# Altium PCB 第一次打板.PcbDoc
Units mil, origin at the board's own origin, x right, y up, seen from the top; angles counter-clockwise.
Board outline 5160 x 2575.29 mil, 2 copper layers (Top Layer, Bottom Layer); 62 components, 86 nets, 344 pads, 7 vias.
Unrouted connection lines stored in the file: 1.
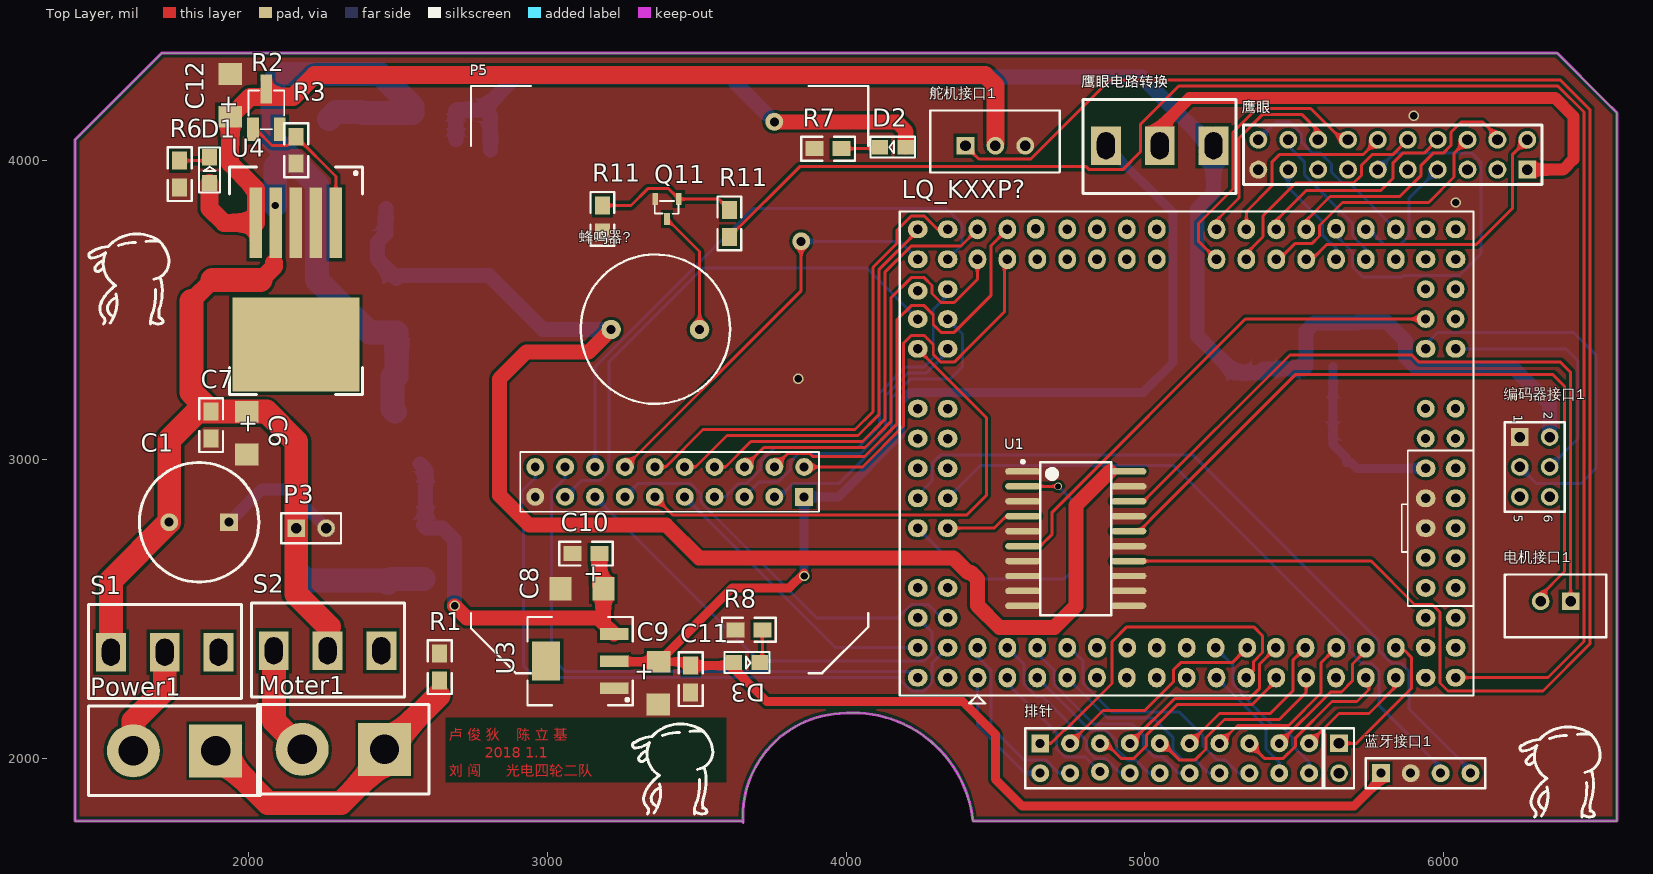
[diagram p0: Top Layer view]
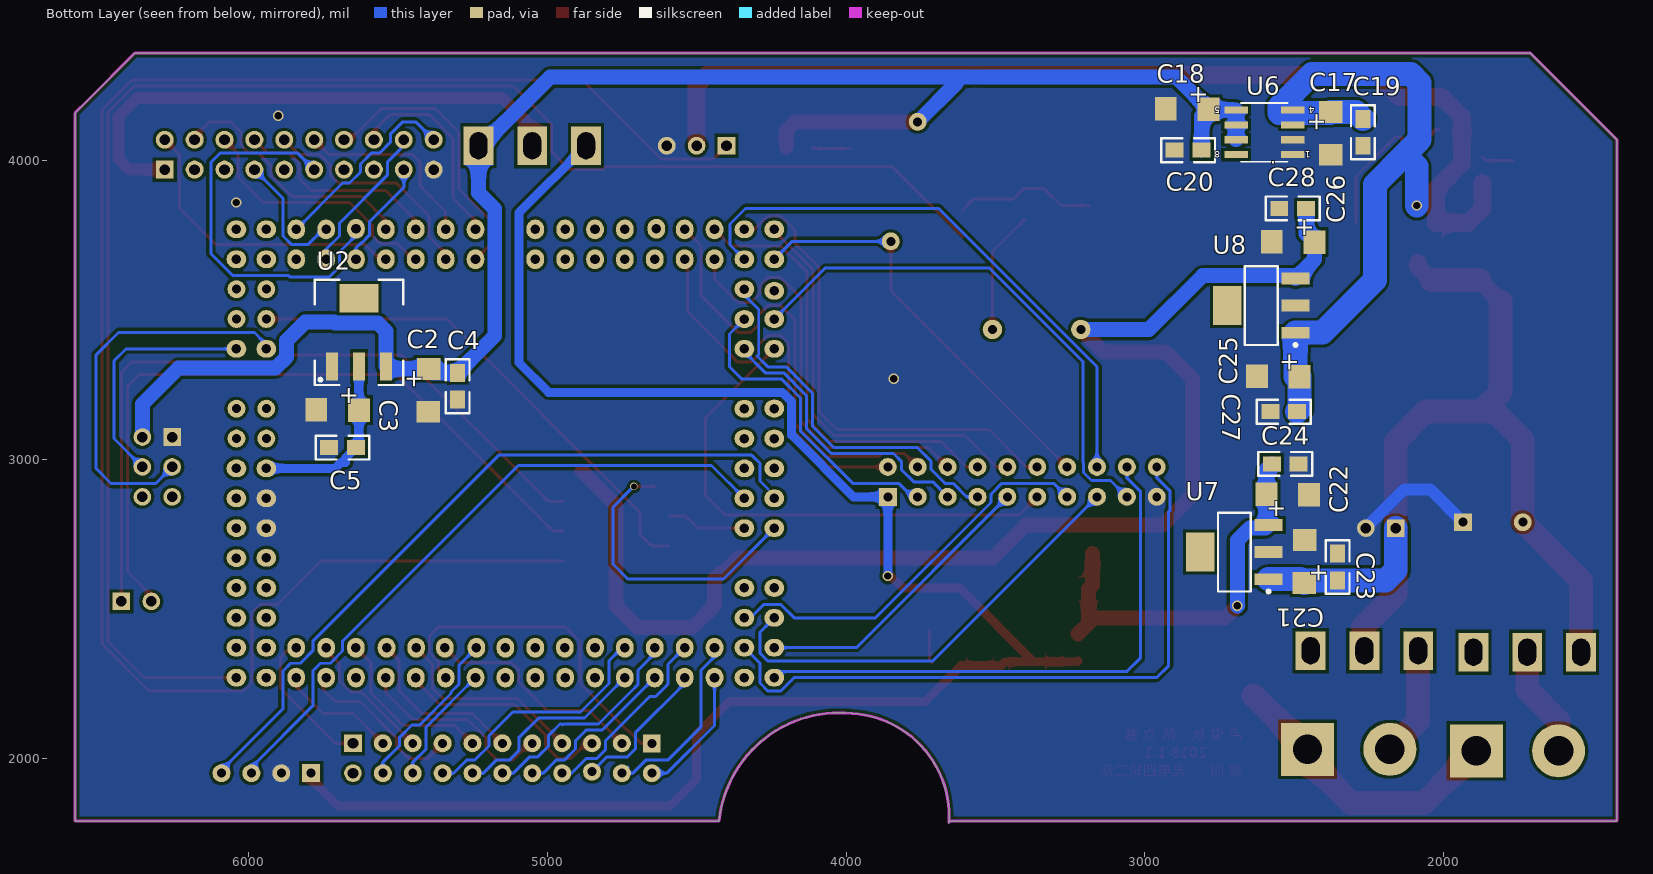
[diagram p1: Bottom Layer view, seen from below]

## Layer stack, top to bottom
Top Solder: solder mask 0.4, Solder Resist, Dk 3.5
Top Layer: signal copper 1.4
Dielectric 1: dielectric 12.6, FR-4, Dk 4.8
Bottom Layer: signal copper 1.4
Bottom Solder: solder mask 0.4, Solder Resist, Dk 3.5

## Board outline
1420,1790 1420,4070 1710,4360 6380,4360 6540,4200 6580,4160 6580,1790 4424.71,1790 ccw(c4022.35,1747.65) 3980,2150 ccw(c4000.29,1805) 3655.29,1784.71 3650,1790

## Design rules (kind name [scope] priority, off if disabled: settings)
Clearance [All] p1: gap=10
ComponentClearance [All] p1: gap=0 collisioncheckmode=3 verticalgap=0 showdistances=FALSE
PlaneConnect [All] p1: planeconnectstyle=Direct reliefexpansion=20 reliefentries=4 reliefconductorwidth=10 reliefairgap=10
PolygonConnect [All] p1: connectstyle=Direct reliefconductorwidth=10 reliefentries=4 polygonreliefangle="90 Angle" airgapwidth=10
RoutingVias [All] p1: holewidth=28 width=50 viastyle="Through Hole" minholewidth=28 minwidth=50 maxholewidth=28 maxwidth=50
SolderMaskExpansion [All] p1: expansion=4
Width [All] p1: maxlimit=100 minlimit=10 preferedwidth=10
28 further rules are at their usual default settings.

## Classes and differential pairs
component class Sheet1: LQ_KXXP?

## Components (designator, comment, footprint, x,y, rotation, side; value= is the part's Value field where it differs from the comment)
* "Component_1" HDR2X1 5650,2050 r270 top
C1 "C-470uf电解电容" C-470uF电解电容 1835,2790 r180 top
C2 "C-10uf钽电容" 10uf钽电容 5400,3235 r270 bottom
C3 "C-10uf钽电容" 10uf钽电容 5698,3168 r0 bottom
C4 "C-0.1uf" 0805 5300,3200 r90 bottom
C5 "C-0.1uf" 0805 5730,3040 r180 bottom
C6 "C-22uf钽电容" C-22uf钽电容 1992,3092 r270 top
C7 "C-0.1uf" 0805 1875,3070 r90 top
C8 "C-10uf钽电容" 10uf钽电容 3120,2570 r180 top
C9 "C-10uf钽电容" 10uf钽电容 3370,2255 r270 top
C10 "C-0.1uf" 0805 3085,2685 r0 top
C11 "C-0.1uf" 0805 3480,2220 r90 top
C12 "C-22uf钽电容" C-22uf钽电容 1942,4215 r90 top
C17 "C-10uf钽电容" 10uf钽电容 2380,4095 r270 bottom
C18 "C-10uf钽电容" 10uf钽电容 2855,4175 r0 bottom
C19 "C-0.1uf" 0805 2270,4050 r90 bottom
C20 "C-0.1uf" 0805 2810,4035 r0 bottom
C21 "C-10uf钽电容" 10uf钽电容 2463,2655 r90 bottom
C22 "C-10uf钽电容" 10uf钽电容 2525,2880 r180 bottom
C23 "C-0.1uf" 0805 2355,2685 r270 bottom
C24 "C-0.1uf" 0805 2485,2985 r0 bottom
C25 "C-10uf钽电容" 10uf钽电容 2550,3280 r0 bottom
C26 "C-10uf钽电容" 10uf钽电容 2500,3730 r0 bottom
C27 "C-0.1uf" 0805 2580,3160 r180 bottom
C28 "C-0.1uf" 0805 2460,3840 r0 bottom
D1 "" LED-0805 1870,3970 r90 top
D2 "" LED-0805 4155,4045 r180 top
D3 "" LED-0805 3670,2320 r0 top
LQ_KXXP? "LQ_KXXP144-SYSVG" LQ_KXXP144-SYSVG 4440,2270 r0 top
Moter1 "驱动接口" 14AWG接口x2 2455,2030 r180 top
P3 "数码管接口" HDR2X1 2160,2770 r0 top
P5 "山外LCD" 山外LCD插座 2745,2285 r0 top
Power1 "电源接口" 14AWG接口x2 1890,2025 r180 top
Q11 "QNPN" J3Y晶体管 3405,3840 r180 top (schematic designator Q?)
R1 "0欧电阻" 0805 2640,2350 r270 top
R2 "10K可调电阻" 10K贴片可调电阻 2060,4180 r0 top
R3 "1k" 0805 2160,3990 r90 top
R6 "5.1k" 0805 1770,3910 r90 top
R7 "4.7k" 0805 3895,4040 r0 top
R8 "3.3k" 0805 3630,2430 r0 top
R11 "100R" 0805 3610,3745 r90 top (schematic designator R?)
R11 "1k" 0805 3185,3760 r90 top (schematic designator R?)
S1 "三脚开关" 大开关 1720,2355 r180 top
S2 "三脚开关" 大开关 2265,2360 r180 top
U1 "74HC244" 74HC244 4770,2730 r0 top
U2 "LM1117-3.3V" LM1117 5630,3425 r90 bottom
U3 "LM1117-3.3V" LM1117 3110,2325 r180 top
U4 "LM2941" LM2941 2160,3590 r270 top
U6 "TPS7350" TPS7350 2600,4095 r0 bottom
U7 "LM2940-TO-223-5V" lm2940-sot223 2700,2690 r0 bottom
U8 "LM2940-TO-223-5V" lm2940-sot223 2610,3515 r0 bottom
排针 "Component_1" HDR10X2 4650,2050 r0 top
电机接口1 "电机接口1" 白插座2X1 6425,2525 r180 top
编码器接口1 "编码器接口" 编码器接口 6305,2975 r270 top
舵机接口1 "舵机接口" 白插座3X1 4400,4050 r0 top
蓝牙接口1 "蓝牙串口接口" 蓝牙串口接口 5790,1950 r0 top
蜂鸣器? "Buzzer" 蜂鸣器 3362,3435.98 r0 top
鹰眼 "鹰眼" H10X2 6280,4070 r270 top (schematic designator H*?)
鹰眼电路转换 "三脚开关" 大开关 5050,4050 r0 top (schematic designator S?)
? "Comment" 兔斯基 1610,3600 r0 top
? "Comment" 兔斯基 6400,1950 r0 top
? "Comment" 兔斯基 3430,1960 r0 top

## Footprints (in the part's own frame and the unit in brackets; to place one, negate y for a bottom-side part, rotate by r counter-clockwise, add the part's x,y. Pads: shape width x height; smd on the part's side, far side on the other; paste and mask are expansions set on the pad)
10K贴片可调电阻 [mm]
  rect 1x2 smd paste-0.025 mask+0: 1(-1.143,-1.905) 3(1.143,-1.905)
  rect 1x2.5 smd paste-0.025 mask+0: 2(0,1.524)
  silkscreen extent -1.52,-1.91 1.52,1.4
10uf钽电容 [mil]
  rect 72.99x78.74 smd: 1(-68,3) 2(75,2)
14AWG接口x2 [mm] "电源洞洞"
  rect 4.5x4.5 hole 2.5: 1(-0.015,0)
  round 4.5 hole 2.5: 2(6.985,0)
  silkscreen extent -3.81,-3.81 10.79,3.81
74HC244 [mm]
  oval 3x0.55 smd: 1(-4.525,5.842) 2(-4.525,4.572) 3(-4.525,3.302) 4(-4.525,2.032) 5(-4.525,0.762) 6(-4.525,-0.508) 7(-4.525,-1.778) 8(-4.525,-3.048) 9(-4.525,-4.318) 10(-4.525,-5.588) 11(4.475,-5.588) 12(4.475,-4.318) 13(4.475,-3.048) 14(4.475,-1.778) 15(4.475,-0.508) 16(4.475,0.762) 17(4.475,2.032) 18(4.475,3.302) 19(4.475,4.572) 20(4.475,5.842)
  silkscreen extent -4.65,-6.37 3,6.79, body extent -3.82,-6.38 3.77,6.63, height 2.64
0805 [mil]
  rect 60x50 smd: 1(0,0) 2(90,0)
  silkscreen extent -45,-40 135,40
C-22uf钽电容 [mil]
  rect 72.99x78.74 smd: 1(-68,3) 2(75,2)
C-470uF电解电容 [mil] "可用于470uF,1000uF,2200uF"
  rect 60x60 hole 30: 1(-100,0)
  round 60 hole 30: 2(100,0)
  silkscreen extent -200,-200 200,200
H10X2 [mil] "鹰眼直插管脚"
  rect 60x60 hole 36: 1(100,0)
  round 60 hole 36: 2(0,0) 3(100,-100) 4(0,-100) 5(100,-200) 6(0,-200) 7(100,-300) 8(0,-300) 9(100,-400) 10(0,-400) 11(100,-500) 12(0,-500) 13(100,-600) 14(0,-600) 15(100,-700) 16(0,-700) 17(100,-800) 18(0,-800) 19(100,-900) 20(0,-900)
  silkscreen extent -50,-950 150,50
HDR2X1 [mm] "Connector; Header; 2 Position"
  rect 1.5x1.5 hole 0.9: 1(0,0)
  round 1.5 hole 0.9: 2(2.54,0)
  silkscreen extent -1.27,-1.27 3.81,1.27
HDR10X2 [mil]
  rect 60x60 hole 30: 1(0,0)
  round 60 hole 30: 2(100,0) 3(200,0) 4(300,0) 5(400,0) 6(500,0) 7(600,0) 8(700,0) 9(800,0) 10(900,0) 11(900,-100) 12(800,-100) 13(700,-100) 14(600,-100) 15(500,-100) 16(400,-100) 17(300,-100) 18(200,-95) 19(100,-100) 20(0,-100)
  silkscreen extent -50,-150 945,50
J3Y晶体管 [mm]
  rect 0.5x1 smd: 1(-0.9,-0.8) 2(1.1,-0.8) 3(0.1,0.9)
  silkscreen extent -0.87,-0.63 1.15,0.45
LED-0805 [mm]
  rect 1.4x1.27 smd: 1(-1.143,0) 2(1.067,0)
  silkscreen extent -1.94,-0.89 1.87,0.89
LM1117 [mm]
  rect 2.4x1 smd: 1(-2.9,2.3) 2(-2.9,0) 3(-2.9,-2.3)
  rect 2.4x3.3 smd: 4(2.9,0)
  silkscreen extent -4.47,-3.76 4.47,3.76, body extent -1.85,-3.35 1.85,3.35, height 1.8
lm2940-sot223 [mm]
  rect 2.4x1 smd: 1(-2.9,2.3) 2(-2.9,0) 3(-2.9,-2.3)
  rect 2.4x3.3 smd: 4(2.9,0)
  silkscreen extent -3.02,-3.35 1.4,3.47, body extent -1.85,-3.35 1.85,3.35, height 1.8
LM2941 [mm]
  rect 6x1.07 smd: 1(-5.133,3.376) 2(-5.133,1.676) 3(-5.133,-0.024) 4(-5.133,-1.724) 5(-5.133,-3.424)
  rect 8x10.8 smd: 6(5.225,-0.024)
  silkscreen extent -9.86,-5.66 9.44,5.61, body extent -4.65,-5.23 4.24,5.18, height 4.65
LQ_KXXP144-SYSVG [mil]
  oval 59x66 hole 32: 1(0,0) 2(0,100) 3(100,0) 4(100,100) 5(200,0) 6(200,100) 7(300,0) 8(300,100) 9(400,0) 10(400,100) 11(500,0) 12(500.79,100) 13(600,0) 14(600,100) 15(700,0) 16(700,100) 17(800,0) 18(796.85,100) 19(900,0) 20(902.36,100) 21(1000,0) 22(998.82,100) 23(1100,0) 24(1097.64,100) 25(1200,0) 26(1200.39,100) 27(1300,0) 28(1300,100) 29(1400,0) 30(1400.39,100) 63(1400,1500) 64(1400,1400) 65(1300,1500) 66(1300,1400) 67(1200,1501.97) 68(1200,1400) 69(1100,1500) 70(1100,1400) 71(1000,1500) 72(1000,1400) 73(900,1500) 74(900,1400) 75(800,1500) 76(800,1400) 79(600,1500) 80(600,1400) 81(500,1500) 82(500,1400) 83(400,1500) 84(400,1400) 85(300,1500) 86(300,1400) 87(194.88,1502.36) 88(200,1400) 89(100,1500) 90(100,1400) 91(0,1500) 92(0,1400)
  oval 66x59 hole 32: 31(1500,0) 32(1600,0) 33(1500,100) 34(1600,100) 35(1500,200) 36(1600,200) 37(1500,300) 38(1600,300) 39(1500,400.79) 40(1600,400) 41(1500,500) 42(1600,500.39) 43(1500,600) 44(1600,600) 45(1500,700) 46(1600,700) 53(1500,1100) 54(1600,1100) 59(1500,1400) 60(1600,1400) 61(1500,1500) 62(1600,1500) 93(-100,1500) 94(-200,1500) 95(-100,1400) 96(-200,1400) 97(-100,1300) 98(-200,1294.09) 99(-100,1200) 100(-200,1200) 101(-100,1100) 102(-200,1100) 105(-100,899.61) 106(-200,900.39) 107(-100,800) 108(-200,800) 109(-100,700) 110(-200,700) 111(-100,600) 112(-200,600) 113(-100,500) 114(-200,500) 117(-100,300) 118(-200,300) 119(-100,200) 120(-200,200) 121(-100,100) 122(-200,100) 123(-100,0) 124(-200,0)
  round 60 hole 30: 47(1500,800) 48(1600,800) 49(1500,900) 50(1600,900) 55(1500,1200) 56(1600,1200) 57(1500,1300) 58(1600,1300)
  round 0 all layers, no hole: 51(1500,1000) 52(1600,1000) 77(700,1500) 78(700,1400) 103(-100,1000) 104(-200,1000) 115(-100,400) 116(-200,400)
  silkscreen extent -260,-87 1660,1560
TPS7350 [mm]
  rect 2x0.6 smd paste-0.025 mask+0: 1(-2.4,1.905) 2(-2.4,0.635) 3(-2.4,-0.635) 4(-2.4,-1.905) 5(2.4,-1.905) 6(2.4,-0.635) 7(2.4,0.635) 8(2.4,1.905)
  silkscreen extent -2,-2.5 2,2.5
兔斯基 [mil]
  silkscreen extent -144,-147 124,155
大开关 [mil]
  rect 100x130 hole 60 slot 90 at 90 deg: 1(-180,0) 2(0,0) 3(180,0)
  silkscreen extent -257,-159 255,155
山外LCD插座 [mil]
  rect 60x60 hole 30: 1(1115,590)
  round 60 hole 30: 2(1015,590) 3(915,590) 4(815,590) 5(715,590) 6(615,590) 7(515,590) 8(415,590) 9(315,590) 10(215,590) 11(215,690) 12(315,690) 13(415,690) 14(515,690) 15(615,690) 16(715,690) 17(815,690) 18(915,690) 19(1015,690) 20(1115,690)
  silkscreen extent 0,0 1330,1965
白插座2X1 [mm] "Connector; Header; 3 Position"
  rect 1.5x1.5 hole 0.9: 1(0,0)
  round 1.5 hole 0.9: 2(2.54,0)
  silkscreen extent -3.05,-2.29 5.59,3.05
白插座3X1 [mm] "Connector; Header; 3 Position"
  rect 1.5x1.5 hole 0.9: 1(0,0)
  round 1.5 hole 0.9: 2(2.54,0) 3(5.08,0)
  silkscreen extent -3,-2.27 8,3
编码器接口 [mm]
  rect 1.5x1.5 hole 0.9: 1(-2.54,-1.27)
  round 1.5 hole 0.9: 2(-2.54,1.27) 3(0,-1.27) 4(0,1.27) 5(2.54,-1.27) 6(2.54,1.27)
  silkscreen extent -3.81,-2.54 3.81,2.54
蓝牙串口接口 [mil]
  rect 60x60 hole 30: 1(0,0)
  round 60 hole 30: 2(100,0) 3(200,0) 4(300,0)
  silkscreen extent -50,-50 350,50
蜂鸣器 [mil]
  round 65 hole 30: 1(-148,-0.98) 2(148,-0.98)
  silkscreen extent -250,-250 250,250

## Part data
C1: "Polarized Capacitor (Surface Mount)"
C2 C3 C6 C8 C9 C12 C17 C18 C21 C22 C25 C26: "Polarized Capacitor (Axial)"
C4 C5 C7 C10 C11 C19 C20 C23 C24 C27 C28: "Capacitor"
D1 D2 D3: library part 发光二极管, "发光二极管"
Moter1: library part 电源接口
P3 电机接口1: library part Header2X1, "Header, 2-Pin, Right Angle"
P5: "Header, 4-Pin, Dual row"
Q11: library part dynatron, "NPN型三极管"
R1 R3 R6 R7 R8 R11 R11: library part R-0805
R2: library part 可调电阻
U1: "内置三态门 用于隔离"
U2 U3: library part LM1117
U7: library part LM2940-TO-223
U8: library part LM2940
舵机接口1: library part Header3X1, "Header, 3-Pin"
蓝牙接口1: "Header, 4-Pin"
蜂鸣器?: "Magnetic Transducer Buzzer"
鹰眼: "鹰眼直插管脚"

## Free pads (board coordinates)
  round 60 hole 30: 2(3850,3730) 4(3760,4130)

## Via types
v1: diameter 35, hole 25, Top Layer to Bottom Layer, 6 vias
v2: diameter 25, hole 20, Top Layer to Bottom Layer, 1 vias

## Nets (pads, with @x,y where several pads share a name; then routed paths per layer and width w, separated by ;. In a path a pad name is that pad's centre, name@x,y a point inside that pad or via, vN(x,y) a via of type N, cw(c..) or ccw(c..) an arc to the next point about the centre after c; other vN are vias at no path point)
1PWM+: U1.18 电机接口1.1 | length 2472.8
  Top Layer w10: U1.18 4996.05,2860 5486.05,3350 5893.57,3350 5918.07,3325.5 6391.54,3325.5 6425,3292.04 电机接口1.1
1PWM-: U1.16 电机接口1.2 | length 2445.5
  Top Layer w10: U1.16 4980.92,2760 5020.22,2799.3 5020.22,2800.22 5503.76,3283.76 6366.24,3283.76 6405,3245 6405,2625 6325,2545 电机接口1.2
3.3V_1: C9.1 C11.2 D3.1 P5.1 U3.2 蓝牙接口1.1 鹰眼电路转换.1 | length 6091.1
  Top Layer w30: U3.2 3226.17,2323 C9.1 ; v1@3860,2620 3810,2570 3620,2570 C9.1 ; 蓝牙接口1.1 5790,1930 5700,1840 4590,1840 4500,1930 4500,2080 4390,2190 3735.01,2190 3615.01,2310 C11.2 3467,2323 C9.1
  Bottom Layer w30: v1(3860,2610) P5.1 3975,2875 4182,3082 4182,3192.97 4213.93,3224.89 4994.89,3224.89 5094.5,3324.5 5094.5,3825.5 鹰眼电路转换.1
3.3V_2: 
5V_1: C2.1 C4.2 C18.1 C20.1 D2.1 pad.4 U2.3 U6.5 U6.6 U6.7 编码器接口1.2 鹰眼电路转换.3 | length 5919.2
  Top Layer w50: pad.4 4170,4130 4199.99,4100.01 D2.1
  Bottom Layer w10: 3560,4280 3570,4280 ; 3630,4260 3630,4280
  Bottom Layer w50: U6.7 U6.6 U6.5 2785,4170 C18.1 ; C20.1 2810,4149 C18.1 ; 3560,4280 2895,4280 C18.1 ; 3570,4280 3630,4280 4990,4280 5220,4050 鹰眼电路转换.3 5230,3892.5 5175.5,3838 5175.5,3414.5 C4.2 5384,3290 C2.1 5531.62,3303 U2.3 5540,3311.38 5540,3430 5566.93,3456.93 5709.46,3456.93 5712.53,3460 5810,3460 5872,3398 5872,3343.28 5909.78,3305.5 6234.5,3305.5 6355,3185 编码器接口1.2 ; 3630,4260 pad.4
5V_2: C26.1 C28.1 U1.20 U8.3 蜂鸣器?.1 | length 4593.2
  Top Layer w50: 蜂鸣器?.1 3139,3360 2930,3360 2840,3270 2840,2880 2940,2780 3398.43,2780 3508.43,2670 4360,2670 4408,2622 4418,2622 4440,2600 4440,2511.28 4513.28,2438 4698,2438 4770,2510 4770,2846.87 4883.13,2960
  Bottom Layer w50: C28.1 2460,3755 C26.1 2432,3669.38 U8.3 2505.24,3614.96 2806.42,3614.96 2986.38,3435 蜂鸣器?.1
5V_3: C8.1 C10.2 C22.1 C24.2 U3.3 U7.3 | length 1371.9
  Top Layer w50: v1(2690,2510) 2730,2470 3169.72,2470 3188,2451.72 ; C10.2 3175,2580 C8.1 3188,2451.72 ; U3.3 3188,2451.72
  Bottom Layer w50: C24.2 2593,2967 C22.1 2593,2787.72 U7.3 2596.38,2770 2650,2770 2690,2730 v1(2690,2510)
5V_5: 
6V: C12.1 D1.1 R2.2 U4.5 舵机接口1.2 | length 3475.3
  Top Layer w60: D1.1 1870,3840 1917.91,3792.09 U4.5 2025.2,3904.8 1939,3991 C12.1 2005.5,4213.5 2149.13,4213.5 2221.62,4286 4466,4286 4500,4252 舵机接口1.2@4500,4060
7.2V: C1.2 C6.1 C7.2 C17.1 C19.2 C21.1 C23.2 C25.1 C27.2 P3.1 S1.3 S2.2 U4.4 U6.3 U6.4 U7.1 U8.1 | length 5651.8
  Top Layer w60: 1810,3530 1880,3600 ; 2040,3600 2086.26,3646.26 2086.26,3658.27
  Top Layer w80: S1.3 1540,2595 C1.2 1735,3065 1830,3160 C7.2 ; 1810,3530 1810,3225 C7.2 ; 1880,3600 2040,3600 ; 2270,2440 2160,2550 P3.1 2160,3060 2060,3160 C6.1 C7.2
  Bottom Layer w80: v1(2090,3850) 2090,3980 2130,4020 ; P3.1 2160,2630 2195,2595 C23.2 2458,2595 C21.1 2478.45,2599.45 U7.1 ; C19.2 2293,4163 C17.1 2380,4160 2550,4160 2550,4180 2440,4290 2110,4290 2080,4260 2080,4070 2130,4020 ; C27.2 2482,3168 C25.1 2495.83,3277 U8.1 2405.55,3424.45 2230,3600 2230,3920 2130,4020
A10: LQ_KXXP?.53 编码器接口1.3 | length 1329.1
  Bottom Layer w10: LQ_KXXP?.53 5960,3370 5952.5,3377.5 5952.5,3397.5 5980,3425 6435,3425 6509.53,3350.47 6509.53,2969.53 6459.53,2919.53 6310.47,2919.53 编码器接口1.3
A11: LQ_KXXP?.54 编码器接口1.4 | length 820.9
  Bottom Layer w10: LQ_KXXP?.54 6410,3370 6450,3330 6450,3070 编码器接口1.4
A12: LQ_KXXP?.55 U1.6 | length 1706
  Top Layer w10: U1.6 4650,2710 4690,2750 4690,2823.44 5336.56,3470 LQ_KXXP?.55
A25: LQ_KXXP?.63 鹰眼.20 | length 665.9
  Bottom Layer w10: 鹰眼.20 5440,4130 5483.64,4130 5525,4088.64 5525,4061.36 5561.36,4025 5588.64,4025 5625,3988.64 5625,3961.36 5661.36,3925 5685,3925 LQ_KXXP?.63
A26: LQ_KXXP?.66 鹰眼.18 | length 507.7
  Bottom Layer w10: 鹰眼.18 5490,4060 5490,4040 5535,3995 5535,3951.36 5695.5,3790.86 5695.5,3748.07 5740,3703.57 LQ_KXXP?.66
A27: LQ_KXXP?.65 鹰眼.7 | length 438.3
  Bottom Layer w10: LQ_KXXP?.65 5750,3770 5800,3720 5856.43,3720 5884.5,3748.07 5884.5,3874.5 鹰眼.7
A28: LQ_KXXP?.68 鹰眼.17 | length 367.9
  Bottom Layer w10: 鹰眼.17 5480,3910 5595.5,3794.5 5595.5,3750.04 5621.57,3723.97 5624.35,3723.97 5640,3708.32 LQ_KXXP?.68
A29: LQ_KXXP?.67 鹰眼.11 | length 1321.7
  Bottom Layer w10: LQ_KXXP?.67 5630,3761.97 5630,3760 5695.5,3694.5 5695.5,3644.5 5730,3610 5860,3610 5865,3615 6051.43,3615 6125,3688.57 6125,3995 6095,4025 5835,4025 鹰眼.11
B0: LQ_KXXP?.70 鹰眼.2 | length 1011.1
  Top Layer w10: LQ_KXXP?.70 5560,3670 5610,3720 6110,3720 6230,3840 6230,4020 鹰眼.2
B1: LQ_KXXP?.69 鹰眼.4 | length 882.7
  Top Layer w10: LQ_KXXP?.69 5540,3800 5620,3880 5853.64,3880 5925,3951.36 5925,3985 5965,4025 5998.64,4025 6025,4051.36 6025,4095 6060,4130 6130,4130 6180,4080 鹰眼.4
B2: LQ_KXXP?.72 鹰眼.6 | length 873
  Top Layer w10: LQ_KXXP?.72 5450,3670 5502,3722 5558.43,3722 5584.5,3748.07 5584.5,3782.9 5661.6,3860 5950,3860 6035,3945 6035,4025 鹰眼.6
B3: LQ_KXXP?.71 鹰眼.8 | length 712.1
  Top Layer w10: LQ_KXXP?.71 5440,3800 5540,3900 5790,3900 5830,3940 5830,3991.72 5863.28,4025 5935,4025 鹰眼.8
B4: LQ_KXXP?.74 鹰眼.10 | length 778.1
  Top Layer w10: LQ_KXXP?.74 5340,3690 5395.5,3745.5 5395.5,3815.5 5505,3925 5698.64,3925 5725,3951.36 5725,3985 5760,4020 5830,4020 鹰眼.10
B5: LQ_KXXP?.73 鹰眼.12 | length 646.3
  Top Layer w10: LQ_KXXP?.73 5340,3830 5425,3915 5425,3995 5450,4020 5730,4020 鹰眼.12
B6: LQ_KXXP?.76 鹰眼.14 | length 959.1
  Top Layer w10: LQ_KXXP?.76 5180,3730 5180,3790 5295,3905 5295,4095 5375,4175 5555,4175 5660,4070 鹰眼.14
B7: LQ_KXXP?.75 鹰眼.16 | length 687
  Top Layer w10: LQ_KXXP?.75 5240,3800 5315,3875 5315,4075 5395,4155 5525,4155 5580,4100 鹰眼.16
BUZZER: LQ_KXXP?.32 R11.1@3610,3745 | length 5419.1
  Top Layer w10: R11.1@3610,3745 3845,3980 4803.79,3980 4813.79,3970 4926.21,3970 4985,4028.79 4985,4121.21 5113.79,4250 6382.43,4250 6469.53,4162.9 6469.53,2390.47 6349.06,2270 LQ_KXXP?.32
C0: LQ_KXXP?.90 P5.20 | length 1320.3
  Top Layer w10: P5.20 4055,2975 4192,3112 4192,3388.43 4218.07,3414.5 4261.93,3414.5 4292,3384.43 4292,3351.57 4318.07,3325.5 4361.93,3325.5 4404.5,3368.07 4530,3493.57 4530,3660 LQ_KXXP?.90
C1: LQ_KXXP?.89 P5.19 | length 1512
  Top Layer w10: P5.19 3805,3020 3878.64,3020 3888.64,3010 4061.72,3010 4170,3118.28 4170,3466.43 4218.07,3514.5 4261.93,3514.5 4292,3484.43 4292,3451.57 4318.07,3425.5 4361.93,3425.5 4484.5,3548.07 4484.5,3714.5 LQ_KXXP?.89
C2: LQ_KXXP?.92 P5.18 | length 1433.9
  Top Layer w10: P5.18 3725,3040 4063.43,3040 4150,3126.57 4150,3540.53 4218.07,3608.59 4261.93,3608.59 4288,3582.53 4288,3555.57 4318.07,3525.5 4361.93,3525.5 4440,3603.57 LQ_KXXP?.92
C3: LQ_KXXP?.91 P5.17 | length 1497.3
  Top Layer w10: P5.17 3596.36,2975 3681.36,3060 4055.15,3060 4130,3134.85 4130,3626.43 4218.07,3714.5 4384.5,3714.5 LQ_KXXP?.91
C4: LQ_KXXP?.94 P5.16 | length 1396.3
  Top Layer w10: P5.16 3496.36,2975 3601.36,3080 4040,3080 4110,3150 4110,3634.72 4240,3764.72 LQ_KXXP?.94
C5: LQ_KXXP?.93 P5.15 | length 1659.6
  Top Layer w10: P5.15 3396.36,2975 3521.36,3100 4030,3100 4090,3160 4090,3643 4170,3723 4170,3766.43 4218.07,3814.5 4261.93,3814.5 4310,3766.43 4310,3770 LQ_KXXP?.93
C6: LQ_KXXP?.96 P5.14 pad.2 | length 1414.2
  Top Layer w10: P5.14 3850,3565 pad.2
  Bottom Layer w10: pad.2 4180,3730 LQ_KXXP?.96
C7: LQ_KXXP?.95 P5.13 | length 1942.2
  Bottom Layer w10: P5.13 3160,3310 3690,3840 4336.43,3840 4388,3788.43 4388,3718 LQ_KXXP?.95
C9: LQ_KXXP?.97 P5.4 | length 1260
  Bottom Layer w10: P5.4 3596.36,2875 3641.36,2920 3668.64,2920 3715,2966.36 3715,2993.64 3761.36,3040 4041.01,3040 4112,3110.99 4112,3221.96 4200.04,3310 4261.72,3310 4297.64,3345.93 4292,3351.57 4292,3502 4340,3550 LQ_KXXP?.97
C10: LQ_KXXP?.100 P5.9 | length 1783.2
  Bottom Layer w10: P5.9 3115,2930 3178.64,2930 3205,2956.36 3205,2988.64 3206.36,2990 3206.36,3326.36 3520,3640 4070,3640 LQ_KXXP?.100
C11: LQ_KXXP?.99 P5.2 | length 1055.9
  Bottom Layer w10: P5.2 3778.79,2875 3823.79,2920 3977.57,2920 4152,3094.43 4152,3205.39 4216.6,3270 4350,3270 4390,3310 4390,3420 LQ_KXXP?.99
C12: LQ_KXXP?.102 P5.6 | length 1747.5
  Top Layer w10: P5.6 3420.5,2814.5 4404.5,2814.5 4470,2880 4470,3140 LQ_KXXP?.102
C13: LQ_KXXP?.101 P5.3 | length 971.9
  Bottom Layer w10: P5.3 3710,2925 3773.64,2925 3815,2966.36 3815,2993.64 3841.36,3020 4049.29,3020 4132,3102.71 4132,3213.68 4208.32,3290 4270,3290 4340,3360 LQ_KXXP?.101
D2: LQ_KXXP?.112 蓝牙接口1.4 | length 2450.2
  Bottom Layer w10: 4261.15,2901.15 4288,2928 4288,2987 4315.5,3014.5 5161.93,3014.5 5784.5,2391.93 5784.5,2359.46 5825.96,2318 5858.43,2318 5884.5,2291.93 5884.5,2165.5 6090,1960 蓝牙接口1.4
D3: LQ_KXXP?.111 蓝牙接口1.3 | length 2221.6
  Bottom Layer w10: LQ_KXXP?.111 4450,2980 5096.83,2980 5684.89,2391.93 5684.89,2358.67 5725.57,2318 5758.43,2318 5784.5,2291.93 5784.5,2175.5 5990,1970 蓝牙接口1.3
D4: LQ_KXXP?.114 U1.2 | length 976
  Top Layer w10: U1.2@4640,2910 v2(4710,2910)
  Bottom Layer w10: LQ_KXXP?.114 4410,2600 4730,2600 4780,2650 4780,2840 4720,2900
D5: LQ_KXXP?.113 U1.4 | length 268.4
  Top Layer w10: LQ_KXXP?.113 4495.5,2770 4535.5,2810 U1.4
D8: 
D9: 
D10: LQ_KXXP?.120 P5.8 | length 1504.7
  Bottom Layer w10: P5.8 3709.5,2325.5 4261.93,2325.5 4288,2351.57 4288,2422 LQ_KXXP?.120
D11: LQ_KXXP?.119 P5.7 | length 1337.9
  Bottom Layer w10: P5.7 3305,2920 3478.64,2920 3515,2883.64 3515,2856.36 3901.36,2470 4173.57,2470 4218.07,2514.5 4275.5,2514.5 4320,2470 LQ_KXXP?.119
D12: LQ_KXXP?.122 P5.5 | length 989.2
  Bottom Layer w10: P5.5 3965,2370 LQ_KXXP?.122
D13: LQ_KXXP?.121 P5.11 | length 2239.5
  Bottom Layer w10: P5.11 2960,2938.64 2915,2893.64 2915,2830 2920,2825 2920,2310 2960,2270 4173.57,2270 4218.07,2225.5 4261.93,2225.5 4288,2251.57 4288,2318 LQ_KXXP?.121
D14: LQ_KXXP?.124 P5.12 | length 1933.9
  Bottom Layer w10: P5.12 3060,2938.64 3015,2893.64 3015,2335 3060,2290 4220,2290 LQ_KXXP?.124 LQ_KXXP?.124@4240,2293.35
GND: C1.1 C2.2 C3.2 C4.1 C5.1 C6.2 C7.1 C8.2 C9.2 C10.1 C11.1 C12.2 C17.2 C18.2 C19.1 C20.2 C21.2 C22.2 C23.1 C24.1 C25.2 C26.2 C27.1 C28.2 LQ_KXXP?.41 LQ_KXXP?.43 P3.2 P5.10 Q11.2 R1.1 R3.1 R6.1 R7.1 R8.1 R11.1@3185,3760 U1.1 U1.3 U1.5 U1.7 U1.8 U1.9 U1.10 U1.11 U1.12 U1.13 U1.15 U1.17 U1.19 U2.1 U3.1 U4.2 U4.3 U6.1 U6.2 U7.2 U8.2 编码器接口1.1 舵机接口1.3 蓝牙接口1.2 鹰眼.19 | length 425.3
  Bottom Layer w40: C1.1 2045,2900 2131.48,2900 2260,2771.48 P3.2
  other v1: 3840,3270 6040,3860 5900,4150
GND_P: Moter1.1 Power1.1 R1.2 | length 986.8
  Top Layer w80: Power1.1 2065.59,1850 2310,1850 2455.59,1995.59 Moter1.1 2635.59,2210
MCU3.3V: C3.1 C5.2 LQ_KXXP?.45 U2.2 | length 612.8
  Bottom Layer w30: U2.2 C3.1 5630,3050 C5.2 5675,3005 5675,2990 5690,2990 5710,2970 LQ_KXXP?.45
NetD1_2: D1.2 R6.2 | length 105
  Top Layer w10: R6.2 1857.98,4000 D1.2
NetD2_2: D2.2 R7.2 | length 130.1
  Top Layer w10: R7.2 4107.99,4040 D2.2
NetD3_2: D3.2 R8.2 | length 113.3
  Top Layer w10: D3.2 3720,2327.99 R8.2
NetD4_2: 
NetH*?_1: 鹰眼.1 鹰眼电路转换.2 | length 1824.2
  Top Layer w10: 鹰眼电路转换.2 鹰眼电路转换.2@5050,4110
  Top Layer w40: 鹰眼电路转换.2@5050,4110 5150,4210 6372.93,4210 6434.53,4148.4 6434.53,4004.53 6400,3970 鹰眼.1
NetMoter1_2: Moter1.2 S2.3 | length 369.4
  Top Layer w80: S2.3 2085,2125 Moter1.2
NetPower1_2: Power1.2 S1.2 | length 373.5
  Top Layer w80: Power1.2 1615,2125 1720,2230 S1.2
NetQ?_1: Q11.1 R11.2 | length 477.8
  Top Layer w10: R11.2@3185,3850 3280.67,3850 3336.85,3906.18 3405.75,3906.18 Q11.1 3573.5,3871.5 R11.2@3610,3835
NetQ?_3: Q11.3 蜂鸣器?.2 | length 414.7
  Top Layer w10: Q11.3 3510,3695.63 蜂鸣器?.2
NetR2_1: R2.1 R3.2 U4.1 | length 534.7
  Top Layer w10: R2.1 2024.73,4105 2079.1,4050.63 2130.9,4050.63 2139.69,4059.42 2139.69,4080 R3.2 2292.91,3947.09 U4.1
Q1: LQ_KXXP?.1 排针.20 | length 436.3
  Bottom Layer w10: LQ_KXXP?.1 4440,2110 4600,1950 排针.20
Q2: LQ_KXXP?.2 排针.19 | length 641.1
  Bottom Layer w10: LQ_KXXP?.2 4440,2340 4484.5,2295.5 4484.5,2105.5 4595,1995 4668.64,1995 4713.64,1950 排针.19 排针.19@4730,1970
Q3: LQ_KXXP?.3 排针.18 | length 483.6
  Bottom Layer w10: LQ_KXXP?.3 4540,2250 4705,2085 4705,2031.36 4731.36,2005 4800,2005 排针.18
Q4: LQ_KXXP?.4 排针.17 | length 640.7
  Bottom Layer w10: LQ_KXXP?.4 4595.5,2314.5 4595.5,2248.07 4621.57,2222 4636.78,2206.78 4656.86,2206.78 4805,2058.64 4805,2028.28 4833.28,2000 4868.64,2000 4918.64,1950 排针.17
Q5: LQ_KXXP?.5 排针.16 | length 558.5
  Bottom Layer w10: LQ_KXXP?.5 4815,2095 4868.64,2095 4905,2058.64 4905,2031.36 4941.36,1995 4968.64,1995 5013.64,1950 排针.16
Q6: LQ_KXXP?.6 排针.15 | length 746.7
  Bottom Layer w10: LQ_KXXP?.6 4640,2350.93 4695.5,2295.43 4695.5,2248.07 4721.57,2222 4828.57,2115 4945,2115 4948.64,2111.36 4952.28,2115 4956.92,2115 4995,2076.92 4995,2041.36 5031.36,2005 5058.64,2005 5113.64,1950 排针.15
Q7: LQ_KXXP?.7 排针.14 | length 668.1
  Bottom Layer w10: LQ_KXXP?.7 4875,2135 5028.64,2135 5095,2068.64 5095,2025 5125,1995 5168.64,1995 5213.64,1950 排针.14
Q8: LQ_KXXP?.8 排针.13 | length 848.4
  Bottom Layer w10: LQ_KXXP?.8 4750,2370 4793.57,2326.43 4793.57,2250 4888.57,2155 5115,2155 5195,2075 5195,2041.36 5241.36,1995 5268.64,1995 5313.64,1950 排针.13
SERVO: U1.14 舵机接口1.1 | length 5974.2
  Top Layer w10: 舵机接口1.1 4444.53,4005.47 4618.44,4005.47 4882.97,4270 6390.71,4270 6489.53,4171.18 6489.53,2382.19 6332.84,2225.5 6014.5,2225.5 5988,2252 5988,2488.43 5961.93,2514.5 5903,2514.5 5757.5,2660 U1.14
W1: LQ_KXXP?.17 排针.12 | length 407
  Bottom Layer w10: LQ_KXXP?.17 5405,2105 5405,2031.36 5450,1986.36 排针.12
W2: LQ_KXXP?.18 排针.11 | length 565.7
  Bottom Layer w10: LQ_KXXP?.18 5295.5,2311.35 5295.5,2248.07 5321.57,2222 5321.57,2216.72 5425,2113.28 5425,2111.36 5452.28,2111.36 5495,2068.64 5495,2041.36 5550,1986.36 排针.11
W3: LQ_KXXP?.19 排针.1 | length 1162.8
  Top Layer w10: 排针.1 4686.36,2050 4731.36,2095 4735,2095 4890,2250 4890,2390 4940,2440 5364.32,2440 5394.32,2410 5394.32,2353.78 5364.5,2323.97 5364.5,2294.5 LQ_KXXP?.19
W4: LQ_KXXP?.20 排针.2 | length 748.3
  Top Layer w10: 排针.2 4860,2160 5000,2160 5095.5,2255.5 5095.5,2295.5 5120,2320 5292.36,2320 LQ_KXXP?.20
W5: LQ_KXXP?.21 排针.3 | length 749.1
  Top Layer w10: 排针.3 4870,2050 4920,2000 4963.64,2000 5005,2041.36 5005,2076.72 5108.28,2180 5360,2180 5440,2260 LQ_KXXP?.21
W6: LQ_KXXP?.22 排针.4 | length 668.9
  Top Layer w10: 排针.4 5100,2200 5350,2200 5384.5,2234.5 5384.5,2315.68 LQ_KXXP?.22
W7: LQ_KXXP?.23 排针.5 | length 677.8
  Top Layer w10: 排针.5 5060,2050 5115,1995 5168.64,1995 5205,2031.36 5205,2068.64 5266.36,2130 5450,2130 5540,2220 LQ_KXXP?.23
W8: LQ_KXXP?.24 排针.6 | length 580.1
  Top Layer w10: 排针.6 5250,2150 5420,2150 5495.5,2225.5 5495.5,2327.86 LQ_KXXP?.24
W9: LQ_KXXP?.26 排针.7 | length 582.3
  Top Layer w10: 排针.7 5310,2110 5481.72,2110 5590,2218.28 5590,2319.61 LQ_KXXP?.26
W10: LQ_KXXP?.27 排针.8 | length 585.1
  Top Layer w10: 排针.8 5400,2000 5463.64,2000 5505,2041.36 5505,2068.64 5626.36,2190 5710,2190 5750,2230 5750,2253.64 5733.64,2270 LQ_KXXP?.27
W11: LQ_KXXP?.28 排针.9 | length 461.5
  Top Layer w10: 排针.9 5622,2222 5658.43,2222 5695.5,2259.07 5695.5,2315.5 5740,2360 LQ_KXXP?.28
W12: LQ_KXXP?.29 排针.10 | length 398.7
  Top Layer w10: 排针.10 5650,2150 5750,2150 5840,2240 LQ_KXXP?.29
W13: *.1 LQ_KXXP?.30 | length 487.5
  Top Layer w10: *.1 5708.79,2050 5892,2233.21 5892,2338 5869.61,2360.39 5850,2360.39 LQ_KXXP?.30
pads on no net: *.2 LQ_KXXP?.9 LQ_KXXP?.10 LQ_KXXP?.11 LQ_KXXP?.12 LQ_KXXP?.13 LQ_KXXP?.14 LQ_KXXP?.15 LQ_KXXP?.16 LQ_KXXP?.25 LQ_KXXP?.31 LQ_KXXP?.33 LQ_KXXP?.34 LQ_KXXP?.35 LQ_KXXP?.36 LQ_KXXP?.37 LQ_KXXP?.38 LQ_KXXP?.39 LQ_KXXP?.40 LQ_KXXP?.42 LQ_KXXP?.44 LQ_KXXP?.46 LQ_KXXP?.47 LQ_KXXP?.48 LQ_KXXP?.49 LQ_KXXP?.50 LQ_KXXP?.51 LQ_KXXP?.52 LQ_KXXP?.56 LQ_KXXP?.57 LQ_KXXP?.58 LQ_KXXP?.59 LQ_KXXP?.60 LQ_KXXP?.61 LQ_KXXP?.62 LQ_KXXP?.64 LQ_KXXP?.77 LQ_KXXP?.78 LQ_KXXP?.79 LQ_KXXP?.80 LQ_KXXP?.81 LQ_KXXP?.82 LQ_KXXP?.83 LQ_KXXP?.84 LQ_KXXP?.85 LQ_KXXP?.86 LQ_KXXP?.87 LQ_KXXP?.88 LQ_KXXP?.98 LQ_KXXP?.103 LQ_KXXP?.104 LQ_KXXP?.105 LQ_KXXP?.106 LQ_KXXP?.107 LQ_KXXP?.108 LQ_KXXP?.109 LQ_KXXP?.110 LQ_KXXP?.115 LQ_KXXP?.116 LQ_KXXP?.117 LQ_KXXP?.118 LQ_KXXP?.123 R2.3 S1.1 S2.1 U2.4 U3.4 U4.6 U6.8 U7.4 U8.4 编码器接口1.5 编码器接口1.6 鹰眼.3 鹰眼.5 鹰眼.9 鹰眼.13 鹰眼.15

## Polygon pours and split planes (outlines as drawn)
GND on Top Layer "Top Overlay-No Net" (solid, remove dead copper, pour order 40): 1220,4510 1220,1590 1520,1290 1610,1380 7190,1380 7190,3820 6430,4580
GND on Bottom Layer "Top Overlay-No Net" (solid, remove dead copper, pour order 42): 1200,4430 1300,4330 1300,1110 6940,1110 7680,1850 6820,2710 6820,4860

## Keep-outs
Keep-Out Layer:
  lines w10: 1420,1790 3650,1790 3655.29,1784.71 cw(c4000.29,1805) 3980,2150 cw(c4022.35,1747.65) 4424.71,1790 6580,1790 6580,1830 6580,4160 6540,4200 6380,4360 1710,4360 1420,4070 1420,1790

## Other copper
Top Layer:
  text "卢 俊 狄    陈 立 基 /         2018 1.1  / 刘 闯      光电四轮二队" at 2670,1930 h60

## Text inside footprints (layer, text, board x,y; h text height)
C2: Bottom Overlay "+" at 5420,3235 h60 r270
C3: Bottom Overlay "+" at 5698,3188 h60
C6: Top Overlay "+" at 2025,3084 h60 r90
C8: Top Overlay "+" at 3120,2590 h60
C9: Top Overlay "+" at 3350,2255 h60 r90
C12: Top Overlay "+" at 1909,4223 h60 r270
C17: Bottom Overlay "+" at 2400,4095 h60 r270
C18: Bottom Overlay "+" at 2855,4195 h60
C21: Bottom Overlay "+" at 2443,2655 h60 r90
C22: Bottom Overlay "+" at 2525,2860 h60 r180
C25: Bottom Overlay "+" at 2550,3300 h60
C26: Bottom Overlay "+" at 2500,3750 h60
U6: Bottom Overlay "4" at 2431.85,4180.47 h21.77 r180; Bottom Overlay "5" at 2747.32,4180.47 h21.77 r180; Bottom Overlay "8" at 2747.32,4030.87 h21.77 r180; Bottom Overlay "1" at 2444.88,4030.87 h21.77 r180
编码器接口1: Top Overlay "6" at 6335,2815 h30 r270; Top Overlay "5" at 6235,2815 h30 r270; Top Overlay "2" at 6335,3160 h30 r270; Top Overlay "1" at 6235,3150 h30 r270